# Altium PCB Power_board_teensy V2.0.PcbDoc
Units mm, origin at the board's own origin, x right, y up, seen from the top; angles counter-clockwise.
Board outline 110.24 x 100.08 mm, 2 copper layers (Top, Bottom), stack 1.572 mm thick; 41 components, 26 nets, 146 pads, 5 vias.
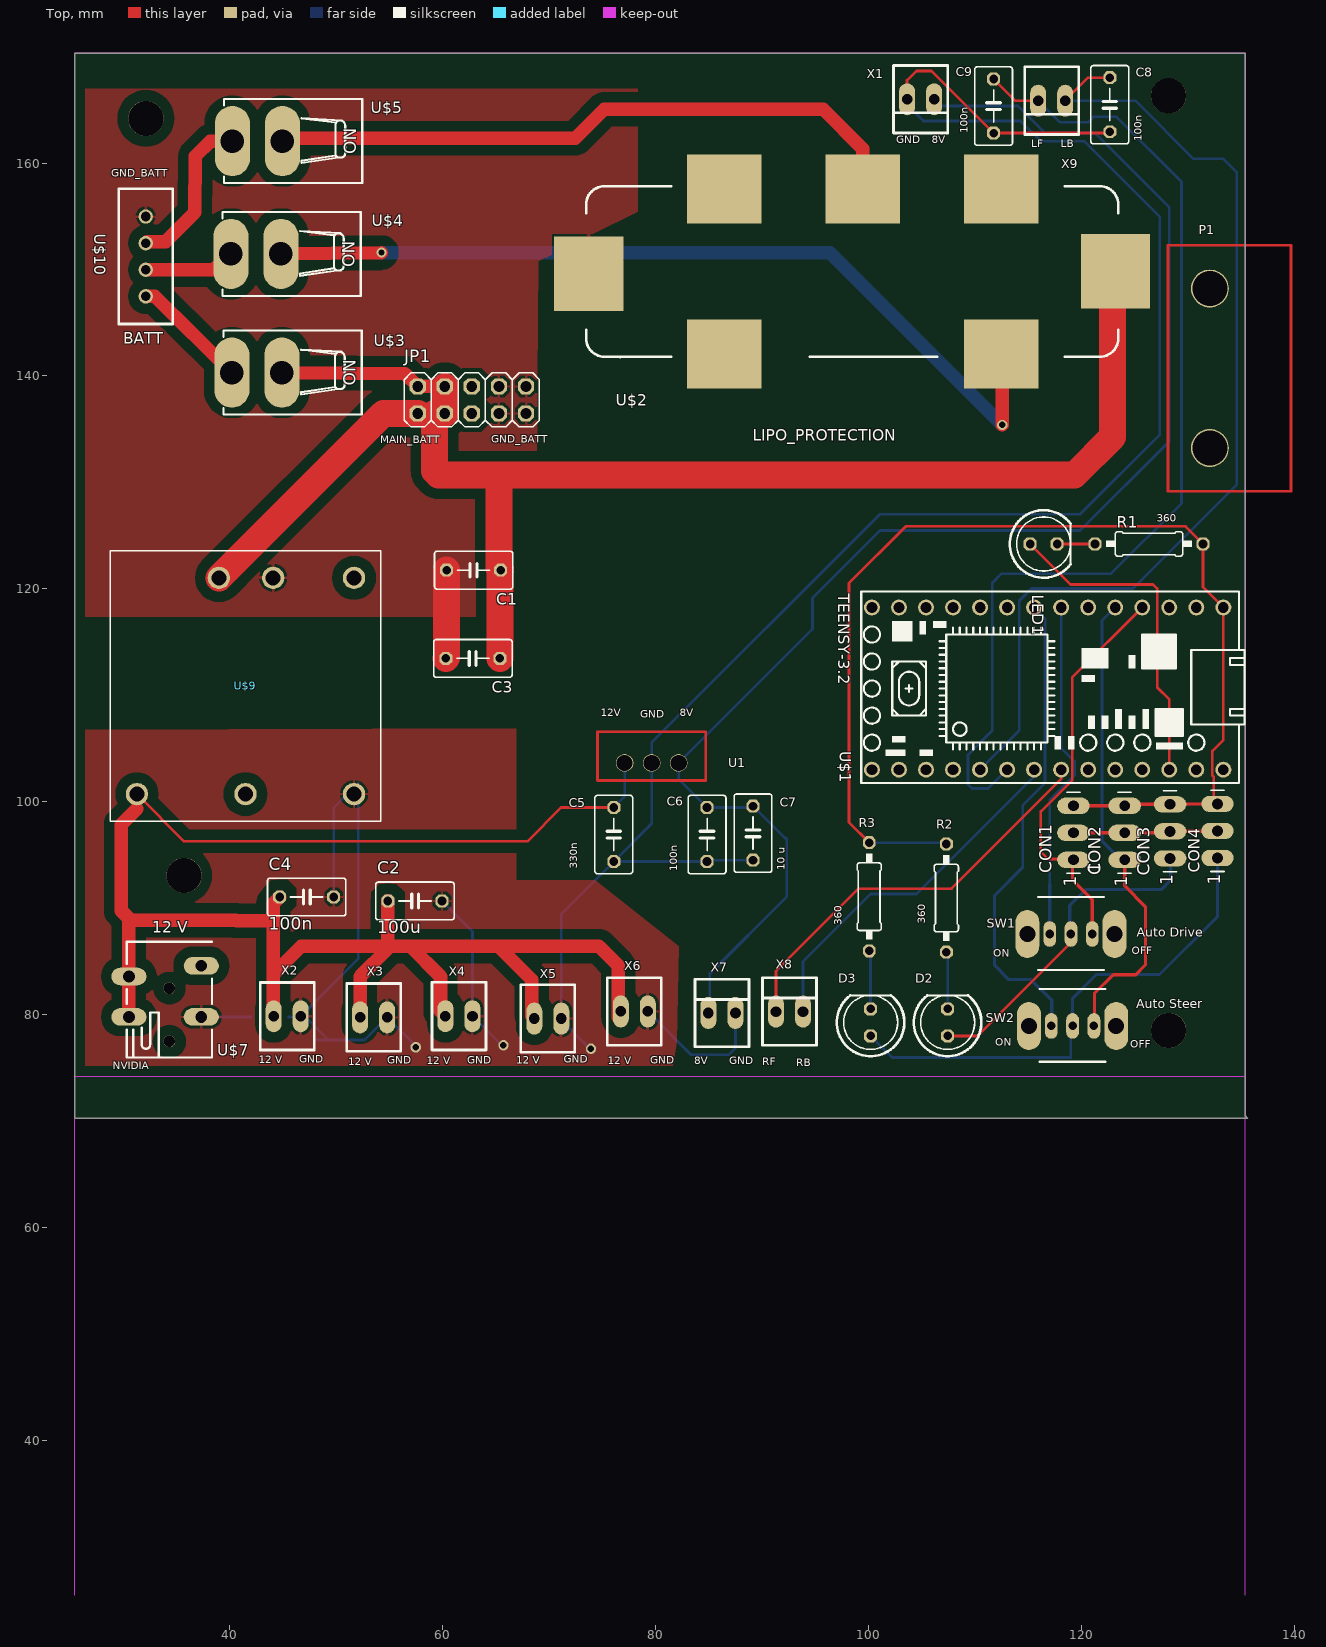
[diagram p0: Top view]
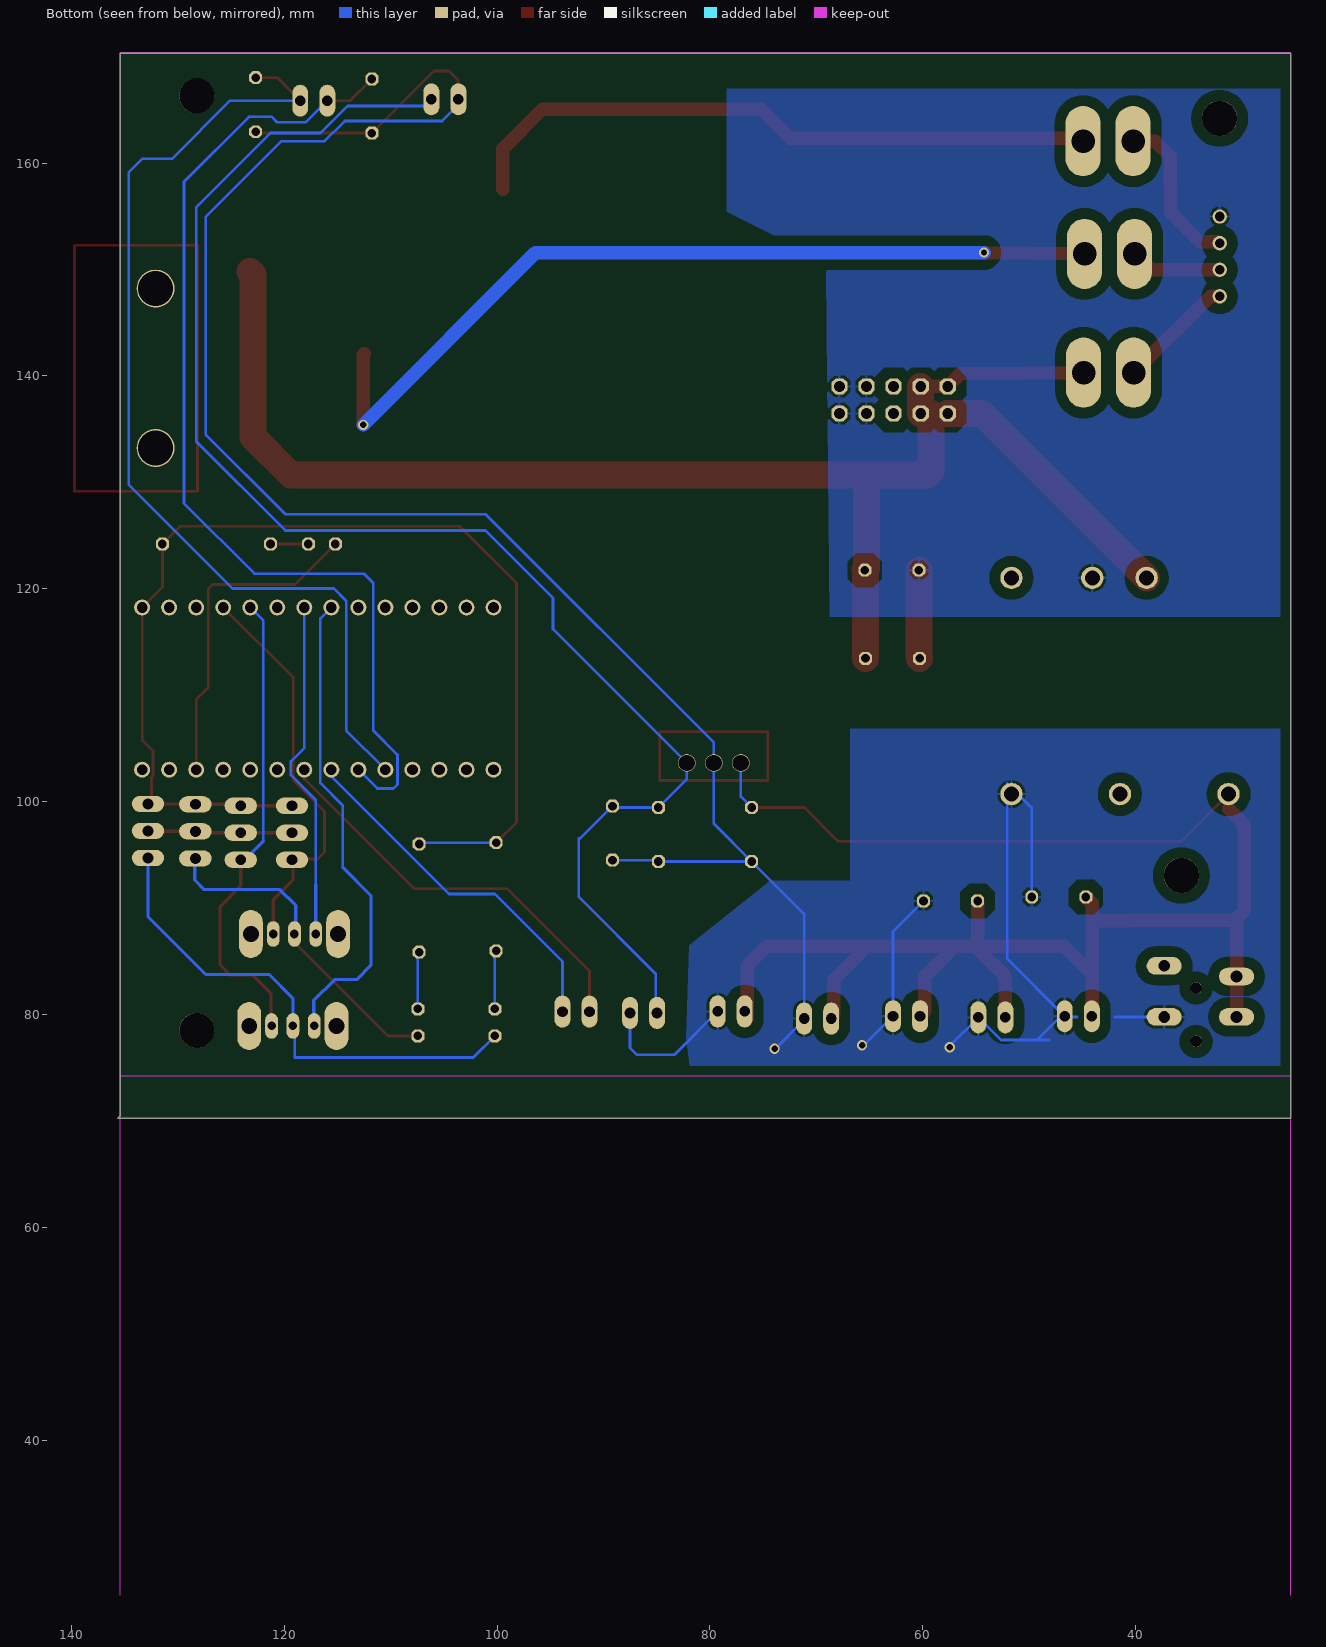
[diagram p1: Bottom view, seen from below]

## Layer stack, top to bottom
Top Solder: solder mask 0.0102, Solder Resist, Dk 3.5
Top: signal copper 0.0356
Dielectric 1: core 1.5011, FR-4, Dk 4.8
Bottom: signal copper 0.0356
Bottom Solder: solder mask 0.0102, Solder Resist, Dk 3.5

## Board outline
25.4,170.307 25.4,70.231 135.636,70.231 135.4,70.467 135.4,170.307

## Design rules (kind name [scope] priority, off if disabled: settings)
Clearance [All] p1: gap=0.152 ignorepadtopadclearanceinfootprint=TRUE except(0: Arc-Hole Track-Hole SMDPad-SMDPad SMDPad-THPad SMDPad-Via SMDPad-Hole THPad-Hole Via-Hole Fill-Hole Poly-Hole Region-Hole Text-Hole; 1: Arc-Poly Track-Poly SMDPad-Poly THPad-Poly Via-Poly Fill-Poly Poly-Poly)
Clearance "Clearance (Same Net)" [All] p2: gap=0 ignorepadtopadclearanceinfootprint=FALSE except(0.152: SMDPad-SMDPad SMDPad-THPad SMDPad-Via)
HoleSize HoleSize_1 [All] p1: absolutevalues=TRUE maxlimit=2540 minlimit=0.33 maxpercent=80.000 minpercent=20.000
HoleSize [All] p2: absolutevalues=TRUE maxlimit=2.54 minlimit=0.025 maxpercent=80.000 minpercent=20.000
HoleToHoleClearance mdViaViaSameLayer [All] p1: gap=0.203 allowstackedmicrovias=TRUE
HoleToHoleClearance [All] p2: gap=0.254 allowstackedmicrovias=TRUE
PasteMaskExpansion mlMinCreamFrame [All] p1: expansion=0
PasteMaskExpansion [All] p2: expansion=0
PolygonConnect ThermalVias [IsVia] p1: connectstyle=Direct reliefconductorwidth=0.254 reliefentries=4 polygonreliefangle="90 Angle" airgapwidth=0.254
PolygonConnect [All] p2: connectstyle=Relief reliefconductorwidth=0.254 reliefentries=4 polygonreliefangle="90 Angle" airgapwidth=0.254
RoomDefinition "Power_board_teensy V2.1" [InComponentClass('Power_board_teensy V2.0')] p1: confinementstyle=ConfineIn formatcopy=TRUE lockcomponents=FALSE outline 94.615,123.19 70.485,123.19 70.485,127.762 94.615,127.762
RoutingVias [All] p1: holewidth=0.711 width=1.27 viastyle="Through Hole" minholewidth=0.711 minwidth=1.27 maxholewidth=0.711 maxwidth=1.27
SilkToSilkClearance [All] p1 off: silktosilkclearance=0.254
SilkToSolderMaskClearance [IsPad] p1 off: minsilkscreentomaskgap=0.254 clearancetoexposedcopper=TRUE
SolderMaskExpansion mlMinStopFrame [All] p1: expansion=0.076
SolderMaskExpansion [All] p2: expansion=0.102
Width Width_1 [All] p1: maxlimit=2540 minlimit=0.152 preferedwidth=0.254
Width [All] p2: maxlimit=0.254 minlimit=0.254 preferedwidth=0.254
25 further rules are at their usual default settings.

## Components (designator, comment, footprint, x,y, rotation, side; value= is the part's Value field where it differs from the comment)
C1 "100u" C050-035X075 62.901,121.742 r180 top
C2 "100u" C050-035X075 57.384,90.661 r0 top
C3 "100n" C050-035X075 62.83,113.45 r180 top
C4 "100n" C050-035X075 47.213,91.031 r0 top
C5 "0.33uF" C050-035X075 76.073,96.901 r270 top
C6 "100nF" C050-035X075 84.836,96.901 r270 top
C7 "10uF" C050-035X075 89.154,97.028 r270 top
C8 "100nF" C050-035X075 122.682,165.481 r270 top
C9 "100nF" C050-035X075 111.76,165.354 r270 top
CON1 "1" MA03-1 119.26,97.064 r90 top
CON2 "" MA03-1 124.078,97.066 r90 top
CON3 "3" MA03-1 128.347,97.2 r90 top
CON4 "4" MA03-1 132.804,97.243 r90 top
D2 "3.3v 10mA" LED5MM 107.442,79.248 r90 top
D3 "3.3v 10mA" LED5MM 100.203,79.248 r90 top
JP1 "PINHD-2X5" 2X05 62.733,137.743 r0 top
LED1 "2.2v 20mA" LED5MM 116.459,124.206 r0 top
P1 "antenna pads" "Antenna pads" 132.08,140.716 r270 top
R1 "70ohms" 0207/10 126.365,124.206 r0 top
R2 "360ohms" 0207/10 107.315,90.932 r90 top
R3 "360ohms" 0207/10 100.076,91.059 r90 top
SW1 "CKN9565-NDCKN9565-ND" CKN9565-ND 121.033,87.555 r180 top (schematic designator SWITCH1)
SW2 "CKN9565-NDCKN9565-ND" CKN9565-ND 121.184,78.914 r180 top (schematic designator SWITCH2)
U1 "12V to 8V LDO" BA7808CP-E2 79.629,103.632 r0 top
U$1 "TEENSY-3.2" TEENSY-3.2 100.33,118.237 r270 top
U$2 "LIPO_PROTECTION" LIPO_PROTECTION 98.474,149.811 r180 top
U$3 "360-3240-ND" 360-3240-ND 52.386,136.363 r90 top
U$4 "360-3240-ND" 360-3240-ND 52.29,147.513 r90 top
U$5 "360-3240-ND" 360-3240-ND 52.431,158.114 r90 top
U$7 "12 V" CP-054-ND 34.311,75.964 r90 top
U$9 "12V_TRANSFORMER" 12V_TRANSFORMER 51.663,110.862 r0 top
U$10 "BATT" BATTERY_CONNECTOR 32.09,151.225 r270 top
X1 "22-23-2021" 22-23-2021 104.902,165.989 r180 top
X2 "22-23-2021" 22-23-2021 45.383,79.822 r0 top
X3 "22-23-2021" 22-23-2021 53.505,79.721 r0 top
X4 "22-23-2021" 22-23-2021 61.52,79.833 r0 top
X5 "22-23-2021" 22-23-2021 69.872,79.608 r0 top
X6 "22-23-2021" 22-23-2021 77.998,80.281 r0 top
X7 "22-23-2021" 22-23-2021 86.233,80.137 r0 top
X8 "22-23-2021" 22-23-2021 92.583,80.264 r0 top
X9 "22-23-2021" 22-23-2021 117.221,165.862 r180 top

## Footprints (in the part's own frame and the unit in brackets; to place one, negate y for a bottom-side part, rotate by r counter-clockwise, add the part's x,y. Pads: shape width x height; smd on the part's side, far side on the other; paste and mask are expansions set on the pad)
2X05 [mil] "2X05"
  oct 60x60 hole 40: 1(-200,-50) 2(-200,50) 3(-100,-50) 4(-100,50) 5(0,-50) 6(0,50) 7(100,-50) 8(100,50) 9(200,-50) 10(200,50)
  silkscreen extent -250,-100 250,100
12V_TRANSFORMER [mm] "12V_TRANSFORMER"
  round 2.1 hole 1.4: P$1(-12.7,10.16) P$2(-7.6,10.16) P$3(-20.4,-10.16) P$4(-10.2,-10.16) P$5(0,-10.16) P$6(0,10.16)
  silkscreen extent -22.9,-12.7 2.5,12.7
22-23-2021 [mm]
  oval 1.5x3 hole 1: 1(-1.27,0) 2(1.27,0)
  silkscreen extent -2.54,-3.18 2.54,3.18
0207/10 [mil] "0207/10"
  oct 48x48 hole 32: 1(-200,0) 2(200,0)
  silkscreen extent -159,-45 159,45
360-3240-ND [mm] "360-3240-ND"
  oval 6.6x3.3 hole 2.2: 2(3.95,7.5) 3(3.95,12.2)
  silkscreen extent 0,0 7.9,13
"Antenna pads" [mil] "sma connector standoff"
  round 140 hole 130: 1(-295,0) 2(295,0)
  Top lines w10: 455,-155 -455,-155 -455,300 455,300 455,-155
BA7808CP-E2 [mil]
  round 65 hole 60: 1(-100,0) 2(0,0) 3(100,0)
  Top lines w10: -200,-65 200,-65 200,115 -200,115 -200,-65
BATTERY_CONNECTOR [mm] "BATTERY_CONNECTOR"
  round 1.35 hole 0.9: P$1(-3.75,0) P$2(-1.25,0) P$3(1.25,0) P$4(3.75,0)
  silkscreen extent -6.35,-2.54 6.35,2.54
C050-035X075 [mil] "C050-035X075"
  oct 48x48 hole 32: 1(-100,0) 2(100,0)
  silkscreen extent -145,-70 145,70
CKN9565-ND [mil] "CKN9565-ND"
  oval 47.25x94.5 hole 31.5: 1(0,0) 2(78.74,0) 3(157.48,0)
  oval 88.59x177.18 hole 59.06: P$4(-82.68,0) P$5(240.16,0)
  silkscreen extent -43,-137 201,133
CP-054-ND [mm] "CP-054-ND"
  round 1.1 hole 1.1: 1(1.5,0) 1(6.5,0)
  oval 1.65x3.3 hole 1.1: 1A(3.8,3.8) 1B(7.6,3.8) 2(3.8,-3) 3(8.6,-3)
  silkscreen extent 0,-4 10.87,4
LED5MM [mil]
  oct 48x48 hole 32: A(-50,0) K(50,0)
  silkscreen extent -125,-125 100,125, body extent -116,-116 116,116, height 346
LIPO_PROTECTION [mm] "LIPO_PROTECTION"
  rect 7x6.5 smd: B1+(12,7.75) B2+(-1,-7.75) B3+(-14,7.75) P+(-14,-7.75) P-(12,-7.75)
  rect 6.5x7 smd: B+(-24.75,0) B-(24.75,0.211)
  silkscreen extent -25,-8.02 25,8.03
MA03-1 [mil] "MA03-1"
  oval 60x120 hole 40: 1(-100,0) 2(0,0) 3(100,0)
  silkscreen extent -150,-25 150,25
TEENSY-3.2 [mm] "TEENSY-3.2"
  round 1.5 hole 1: 0(0,30.48) 1(0,27.94) 2(0,25.4) 3(0,22.86) 3.3V(15.24,27.94) 4(0,20.32) 5(0,17.78) 6(0,15.24) 7(0,12.7) 8(0,10.16) 9(0,7.62) 10(0,5.08) 11(0,2.54) 12(0,0) 13(15.24,0) 14(15.24,2.54) 15(15.24,5.08) 16(15.24,7.62) 17(15.24,10.16) 18(15.24,12.7) 19(15.24,15.24) 20(15.24,17.78) 21(15.24,20.32) 22(15.24,22.86) 23(15.24,25.4) AGND(15.24,30.48) GND(0,33.02) VIN(15.24,33.02)
  silkscreen extent -1.5,-1 16.5,35

## Part data
C1 C2 C3 C4 C5 C6 C7 C8 C9: library part C-US050-035X075, "CAPACITOR, American symbol"
CON1 CON2 CON3 CON4: library part MA03-1, "PIN HEADER", OC_FARNELL=unknown, OC_NEWARK=unknown
D2 D3 LED1: library part LED5MM, "LED   OSRAM: - CHIPLED LG R971, LG N971, LY N971, LG Q971, LY Q971, LO R971, LY R971 LH N974, LH R974 LS Q976, LO Q976, LY Q976 LO Q996 - Hyper CHIPLED LW Q18S LB Q993, LB Q99A, LB R99A - SideLED LS A670, LO A670, LY A670, LG A670, LP A670 LB A673, LV A673, LT A673, LW A673 LH A674 LY A675 LS A676, LA A676, LO A676, LY A676, LW A676 LS A679, LY A679, LG A679 -  Hyper Micro SIDELED® LS Y876, LA Y876, LO Y876, LY Y876 LT Y87S - SmartLED LW L88C, LW L88S LB L89C, LB L89S, LG L890 LS L89K, LO L89K, LY L89K LS L896, LA L896, LO L896, LY L896 - TOPLED LS T670, LO T670, LY T670, LG T670, LP T670 LSG T670, LSP T670, LSY T670, LOP T670, LYG T670 LG T671, LOG T671, LSG T671 LB T673, LV T673, LT T673, LW T673 LH T674 LS T676, LA T676, LO T676, LY T676, LB T676, LH T676, LSB T676, LW T676 LB T67C, LV T67C, LT T67C, LS T67K, LO T67K, LY T67K, LW E67C LS E67B, LA E67B, LO E67B, LY E67B, LB E67C, LV E67C, LT E67C LW T67C LS T679, LY T679, LG T679 LS T770, LO T770, LY T770, LG T770, LP T770 LB T773, LV T773, LT T773, LW T773 LH T774 LS E675, LA E675, LY E675, LS T675 LS T776, LA T776, LO T776, LY T776, LB T776 LHGB T686 LT T68C, LB T68C - Hyper Mini TOPLED® LB M676 - Mini TOPLED Santana® LG M470 LS M47K, LO M47K, LY M47K    Source: http://www.osram.convergy.de   LUXEON: - LUMILED® LXK2-PW12-R00, LXK2-PW12-S00, LXK2-PW14-U00, LXK2-PW14-V00 LXK2-PM12-R00, LXK2-PM12-S00, LXK2-PM14-U00 LXK2-PE12-Q00, LXK2-PE12-R00, LXK2-PE12-S00, LXK2-PE14-T00, LXK2-PE14-U00 LXK2-PB12-K00, LXK2-PB12-L00, LXK2-PB12-M00, LXK2-PB14-N00, LXK2-PB14-P00, LXK2-PB14-Q00 LXK2-PR12-L00, LXK2-PR12-M00, LXK2-PR14-Q00, LXK2-PR14-R00 LXK2-PD12-Q00, LXK2-PD12-R00, LXK2-PD12-S00 LXK2-PH12-R00, LXK2-PH12-S00 LXK2-PL12-P00, LXK2-PL12-Q00, LXK2-PL12-R00    Source: www.luxeon.com   KINGBRIGHT:   KA-3528ASYC Source: www.kingbright.com"
JP1: "PIN HEADER"
R1 R2 R3: library part R0207/10, "RESISTOR, European symbol"
U1: library part BA78M08FP-E2
U$1: library part TEENSY-3.2TEENSY-3.2, "0.1\" pin spacing"
U$3 U$4 U$5: "SPST two lead switch Pin 2 is common Swtich Closed on Down Position DigiKey: http://www.digikey.com/product-detail/en/nkk-switches/M2011S2A1W01/360-3240-ND/1049342 Data Sheet: http://2t70un3m1d9z1kztamkdrd38.wpengine.netdna-cdn.com/wp-content/uploads/2016/02/MtogglesBushing.pdf"
U$7: library part CP-054-ND, "DigiKey: http://www.digikey.com/product-detail/en/cui-inc/PJ-054/CP-054-ND/1644595 Data Sheet: http://www.cui.com/product/resource/pj-054.pdf"
U$9: "CUI Inc ¦ SERIES: PDQ30-D ¦ DESCRIPTION: DC-DC CONVERTER http://www.mouser.com/pdfdocs/pdq30-d.pdf"
U$10: library part BATTERY_CONNECTOR
X1 X2 X3 X4 X5 X6 X7 X8 X9: ".100\" (2.54mm) Center Header - 2 Pin", MF=MOLEX, MPN=22-23-2021, OC_FARNELL=1462926, OC_NEWARK=25C3832

## Free pads (board coordinates)
  round 3.3 hole 3.3: 1(32.101,164.199) 1(35.692,93.055) 1(128.209,78.502) 1(128.209,166.319)

## Via types
v1: diameter 0.956/0.956 (per signal layer), hole 0.6, Top to Bottom, 5 vias

## Nets (pads, with @x,y where several pads share a name; then routed paths per layer and width w, separated by ;. In a path a pad name is that pad's centre, name@x,y a point inside that pad or via, vN(x,y) a via of type N, cw(c..) or ccw(c..) an arc to the next point about the centre after c; other vN are vias at no path point)
BAT1: U$5.3 U$10.P$2 | length 15.2
  Top w1.27: U$10.P$2 32.227,152.612 33.954,152.612 36.699,155.356 36.753,160.635 38.167,162.048 40.215,162.048 U$5.3
BAT2: U$4.3 U$10.P$3 | length 8.6
  Top w1.27: U$10.P$3 38.475,149.975 U$4.3
GND_12: C2.2 C4.2 C5.2 C6.2 C7.2 C8.2 C9.2 U1.2 U$7.2 U$9.P$5 X1.2 X2.2 X3.2 X4.2 X5.2 X6.2 X7.2 | length 265
  Top w0.254: X1.2 103.632,167.767 104.521,168.656 105.918,168.656 C9.2 122.555,162.814 C8.2
  Bottom w0.254: U$7.2 41.966,79.764 ; 45.495,79.764 45.966,79.764 X2.2@46.281,79.449 ; 48.133,77.597 49.276,77.597 ; C4.2 49.753,99.41 52.07,101.727 52.07,85.239 X2.2 47.051,79.822 49.276,77.597 ; v1(57.467,76.92) 57.467,77.029 X3.2 52.652,77.597 49.276,77.597 ; C2.2 62.79,87.795 X4.2 65.517,77.106 v1(65.693,77.106) ; v1(73.915,76.774) 73.848,76.774 71.374,79.248 71.374,79.376 X5.2 71.142,89.43 C5.2 ; X6.2 83.35,76.2 86.868,76.2 87.503,76.835 X7.2 ; C7.2 84.963,94.488 C6.2 C5.2 ; X1.2 103.632,165.481 105.156,163.957 114.3,163.957 116.205,162.052 120.269,162.052 127.381,154.94 127.381,134.493 119.888,127 101.092,127 79.629,105.537 U1.2 79.629,97.917 C5.2
GND_BATT: C1.2 C3.2 JP1.7 JP1.8 JP1.9 JP1.10 U$2.B- U$9.P$2 U$10.P$1 | length 8.3
  Top w2.54: C3.2 60.361,113.521 C1.2
GNDT: CON1.3 CON2.3 CON3.3 CON4.3 R1.2 R2.2 R3.2 U$1.GND | length 107.3
  Top w0.254: R3.2 98.171,98.044 98.171,120.523 103.505,125.857 129.794,125.857 R1.2 131.445,120.142 U$1.GND 133.35,105.791 132.321,104.762 132.321,102.43 132.461,102.29 132.461,100.291 CON4.3@131.953,99.783
  Top w0.305: CON1.3 119.262,99.606 CON2.3 124.213,99.74 CON3.3 128.39,99.783 CON4.3@131.953,99.783
  Bottom w0.254: R3.2 107.188,96.139 R2.2
LB: C8.1 U$1.17 X9.1 | length 95.7
  Top w0.254: X9.1 120.65,168.021 C8.1
  Bottom w0.254: U$1.17 114.173,106.68 114.173,118.872 115.316,120.015 124.841,120.015 134.62,129.794 134.62,159.131 133.35,160.401 130.556,160.401 125.095,165.862 X9.1
LF: C9.1 U$1.18 X9.2 | length 97.6
  Top w0.254: C9.1 113.792,165.862 X9.2
  Bottom w0.254: U$1.18 111.252,101.219 109.728,101.219 109.347,101.6 109.347,104.394 111.633,106.68 111.633,120.523 112.522,121.412 122.809,121.412 129.413,128.016 129.413,158.242 123.317,164.338 121.158,164.338 120.65,163.83 117.983,163.83 X9.2
MAIN_BATT: C1.1 C3.1 JP1.1 JP1.2 JP1.3 JP1.4 U$2.B+ U$3.2 U$9.P$1 | length 150.5
  Top w0.254: U$3.2@44.323,139.75 U$3.2 ; JP1.1 59.236,136.473 JP1.3 ; C1.1@65.268,121.916 C1.1
  Top w1.27: U$3.2 56.451,140.215 JP1.2 JP1.4
  Top w2.54: U$9.P$1@38.961,121.024 U$9.P$1 54.414,136.473 JP1.1 ; 59.236,136.473 59.236,131.079 59.592,130.723 59.636,130.679 65.268,130.679 ; JP1.3 JP1.4 ; C1.1@65.268,121.916 65.268,130.679 ; C3.1 65.37,121.672 C1.1 ; U$2.B+ 122.952,149.54 122.952,134.276 119.355,130.679 65.268,130.679
MOTOR_V: CON1.2 CON2.2 CON3.2 CON4.2 | length 13.6
  Top w0.305: CON1.2 119.262,97.066 CON2.2 128.213,97.066 CON3.2 132.761,97.2 CON4.2
NetD2_K: D2.K R2.1 | length 5.4
  Bottom w0.254: R2.1 107.442,85.725 D2.K
NetD3_K: D3.K R3.1 | length 5.5
  Bottom w0.254: R3.1 100.203,85.852 D3.K
NetLED1_A: LED1.A U$1.3.3V | length 31.2
  Top w0.254: LED1.A 118.999,120.396 126.746,120.396 127.127,120.015 127.127,110.744 128.27,109.601 U$1.3.3V
NetLED1_K: LED1.K R1.1 | length 3.6
  Top w0.254: LED1.K R1.1
NetU$2_B2+: U$2.B2+ U$5.2 | length 61.1
  Top w1.27: U$5.2 45.195,162.328 72.454,162.328 75.179,165.053 95.746,165.053 99.474,161.326 U$2.B2+
NetU$2_B3+: U$2.B3+ U$4.2 | length 81.2
  Top w1.27: U$4.2 54.238,151.59 v1(54.24,151.593) ; U$2.B3+ 112.576,141.959 v1(112.576,135.394)
  Bottom w1.27: v1(54.24,151.593) 96.377,151.593 v1(112.576,135.394)
PIN2: CON1.1 SW1.1 U$1.2 | length 38.1
  Top w0.254: 116.877,94.592 116.205,95.264 116.205,99.06 119.139,101.994 119.139,111.646 U$1.2
  Top w0.305: 116.877,94.592 119.191,94.592 CON1.1 119.164,94.428 119.164,92.638 121.033,90.769 SW1.1
PIN3: CON2.1 SW2.1 U$1.3 | length 45
  Top w0.305: SW2.1 121.244,78.973 121.244,81.983 122.99,83.729 125.111,83.729 126.026,84.643 126.026,90.131 124.078,92.078 CON2.1
  Bottom w0.254: 121.955,96.266 121.955,117.002 U$1.3
  Bottom w0.305: 121.955,96.266 123.695,94.526 CON2.1
PIN5: SW1.3 U$1.5 | length 32.2
  Bottom w0.254: 117.033,92.187 117.033,100.142 119.38,102.489 119.38,103.759 118.11,105.029 U$1.5
  Bottom w0.305: SW1.3 117.033,92.187
PIN6: SW2.3 U$1.6 | length 45.2
  Bottom w0.254: 114.497,93.814 114.497,99.638 116.599,101.74 116.599,117.208 U$1.6
  Bottom w0.305: 114.497,93.814 111.855,91.172 111.855,84.604 113.185,83.273 115.265,83.273 117.219,81.319 117.219,78.949 SW2.3
RB: U$1.19 X8.2 | length 34.3
  Bottom w0.254: X8.2 93.853,84.963 100.203,91.313 104.521,91.313 115.57,102.362 U$1.19
RF: U$1.20 X8.1 | length 39
  Top w0.254: X8.1 91.313,84.074 99.06,91.821 107.823,91.821 118.11,102.108 U$1.20
SC: CON3.1 D2.A SW1.2 | length 31.3
  Top w0.254: D2.A 110.236,77.978 119.033,86.775 SW1.2
  Bottom w0.305: SW1.2 118.918,87.67 118.918,90.237 120.415,91.734 127.501,91.734 128.4,92.632 128.4,94.608 CON3.1
SD: CON4.1 D3.A SW2.2 | length 47.6
  Bottom w0.254: D3.A 102.235,75.946 118.999,75.946 118.999,78.729 SW2.2
  Bottom w0.305: SW2.2 119.184,81.522 121.413,83.751 127.352,83.751 132.804,89.202 CON4.1
V8: C6.1 C7.1 U1.3 X1.1 X7.1 | length 142.1
  Bottom w0.254: X7.1 85.09,80.264 85.09,83.82 92.329,91.059 92.329,96.52 92.202,96.52 C7.1 89.027,99.441 C6.1 82.169,102.108 U1.3 94.742,116.205 94.742,119.126 101.092,125.476 119.888,125.476 128.27,133.858 128.27,155.829 121.285,162.814 116.586,162.814 114.046,165.354 106.807,165.354 X1.1
V11.2: U$3.3 U$10.P$4 | length 11
  Top w1.27: U$10.P$4 32.926,147.475 U$3.3
V12: C2.1 C4.1 C5.1 U1.1 U$9.P$3 X2.1 X3.1 X4.1 X5.1 X6.1 | length 166.2
  Top w0.254: U$9.P$3 35.699,96.266 67.945,96.266 71.12,99.441 C5.1
  Top w1.27: 30.511,79.763 30.511,88.853 ; 31.263,99.331 29.766,97.834 29.766,89.756 30.511,89.012 30.511,88.853 ; X2.1 44.07,79.822 44.07,83.749 ; C4.1 44.07,90.428 44.07,88.511 ; X3.1 52.225,79.732 52.225,83.559 54.844,86.178 54.844,86.394 ; C2.1 54.844,86.394 ; X4.1 59.788,80.295 59.788,83.559 56.952,86.394 ; X5.1 68.355,79.855 68.355,83.264 65.224,86.394 ; X6.1 76.509,79.715 76.509,84.563 74.678,86.394 65.224,86.394 ; 30.511,88.853 40.567,88.853 40.639,88.781 43.8,88.781 44.07,88.511 ; 44.07,83.749 46.715,86.394 54.844,86.394 ; 44.07,83.749 44.07,88.511 ; 54.844,86.394 56.952,86.394 ; 56.952,86.394 65.224,86.394
  Bottom w0.254: C5.1 77.089,100.457 U1.1
pads on no net: JP1.5 JP1.6 P1.1 P1.2 SW1.P$4 SW1.P$5 SW2.P$4 SW2.P$5 U$1.0 U$1.1 U$1.4 U$1.7 U$1.8 U$1.9 U$1.10 U$1.11 U$1.12 U$1.13 U$1.14 U$1.15 U$1.16 U$1.21 U$1.22 U$1.23 U$1.AGND U$1.VIN U$2.B1+ U$2.P+ U$2.P- U$7.1 U$7.1A U$7.1B U$7.3 U$9.P$4 U$9.P$6
copper on no net: | length 0.1
  Top w2.54: 59.592,130.723 ccw(c59.636,130.723) 59.636,130.679

## Polygon pours and split planes (outlines as drawn)
GND_BATT on Bottom "GND_BATT_L02_P015" (solid, remove dead copper, pour order 15): 68.757,117.348 25.754,117.348 25.754,166.99 78.393,166.99 78.393,155.443 69.058,150.774
GND_12 on Bottom "GND_12_L02_P014" (solid, remove dead copper, pour order 14): 66.802,106.859 66.802,92.554 74.318,92.554 81.922,86.486 82.203,77.767 81.715,73.787 25.388,73.402 25.358,77.253 25.909,106.876
GND_12 on Top "GND_12_L01_P012" (solid, remove dead copper, pour order 12): 25.351,106.741 66.929,106.883 66.929,92.603 74.316,92.603 82.153,86.418 81.985,77.406 81.307,73.583 25.292,73.969 25.52,77.961
GND_BATT on Top "GND_BATT_L01_P013" (solid, remove dead copper, pour order 13): 68.695,117.348 25.692,117.348 25.692,166.99 78.33,166.99 78.33,155.443 68.996,150.774

## Keep-outs
Keep-Out Layer:
  lines w0: 25.4,25.4 25.4,170.383 135.4,170.383 135.4,25.4 ; 25.4,74.168 135.4,74.168

## Silkscreen, mask and mechanical layers (free items; w line width, h text height)
Top Overlay:
  text "100n" at 109.601,162.78 h1.26 r90
  text "100n" at 125.958,162.052 h1.26 r90
  text "GND" at 102.616,161.582 h1.26
  text "8V" at 105.929,161.581 h1.26
  text "LF" at 115.278,161.214 h1.26
  text "LB" at 118.075,161.214 h1.26
  text "GND_BATT" at 28.86,158.42 h1.26
  text "GND_BATT" at 64.534,133.446 h1.26
  text "MAIN_BATT" at 54.106,133.387 h1.26
  text "360" at 127.071,126.034 h1.26
  text "12V" at 74.842,107.734 h1.26
  text "8V" at 82.292,107.734 h1.26
  text "GND" at 78.567,107.572 h1.26
  text "330n" at 72.92,93.709 h1.26 r90
  text "10 u" at 92.435,93.547 h1.26 r90
  text "100n" at 82.313,93.466 h1.26 r90
  text "360" at 105.633,88.527 h1.26 r90
  text "360" at 97.779,88.365 h1.26 r90
  text "Auto Drive" at 125.234,87.303 h0.86
  text "OFF" at 124.74,85.379 h1.26
  text "ON" at 111.739,85.137 h1.26
  text "Auto Steer" at 125.179,80.583 h0.86
  text "ON" at 111.9,76.761 h1.26
  text "OFF" at 124.589,76.588 h1.26
  text "GND" at 46.512,75.197 h1.26
  text "GND" at 71.391,75.166 h1.26
  text "12 V" at 42.708,75.135 h1.26
  text "GND" at 62.318,75.104 h1.26
  text "GND" at 79.496,75.104 h1.26
  text "GND" at 54.773,75.073 h1.26
  text "12 V" at 66.905,75.09 h1.26
  text "12 V" at 75.519,75.048 h1.26
  text "12 V" at 58.505,75.042 h1.26
  text "8V" at 83.625,75.012 h1.26
  text "GND" at 86.937,75.012 h1.26
  text "12 V" at 51.139,74.955 h1.26
  text "RF" at 90.029,74.939 h1.26
  text "RB" at 93.194,74.865 h1.26
  text "NVIDIA" at 29,74.558 h1.26
Dimension:
  lines w0: 25.4,25.4 25.4,170.383 135.4,170.383 135.4,25.4 ; 25.4,74.168 135.4,74.168
Unrouted:
  lines w0: 31.263,50.563 31.263,51.934

## Dimensions
25.4,170.383 to 128.209,166.319 on Dimension
25.4,170.383 to 32.101,164.199 on Dimension
135.951,170.652 to 128.209,78.502 on Dimension
135.4,170.383 to 128.209,166.319 on Dimension
25.4,170.383 to 32.101,164.199 on Dimension
25.4,170.383 to 35.692,93.055 on Dimension
135.4,170.383 to 135.318,70.036 on Dimension
135.4,170.307 to 25.352,69.719 on Dimension

## Text inside footprints (layer, text, board x,y; h text height)
CON2: Top Overlay "1" at 124.713,91.986 h1.97 r90
CON3: Top Overlay "1" at 128.982,92.12 h1.97 r90
CON4: Top Overlay "1" at 133.439,92.163 h1.97 r90
U$3: Top Overlay "ON" at 52.186,139.063 h1.97 r90
U$4: Top Overlay "ON" at 52.09,150.213 h1.97 r90
U$5: Top Overlay "ON" at 52.231,160.814 h1.97 r90